# EAGLE board 6309 (EAGLE 9.6.2)
REV: B
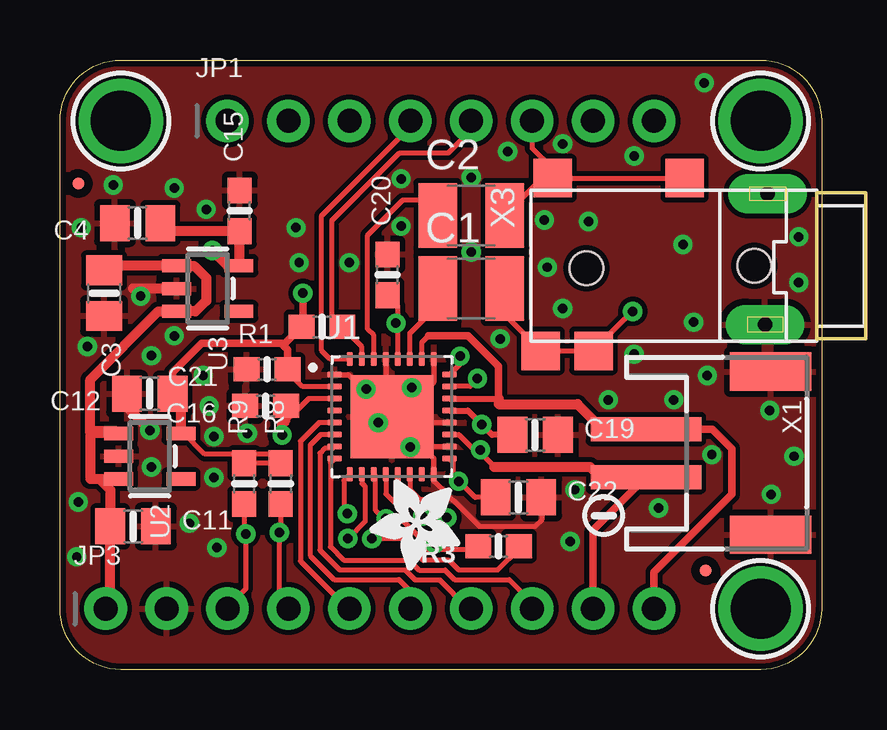
[diagram p0: board, top side]
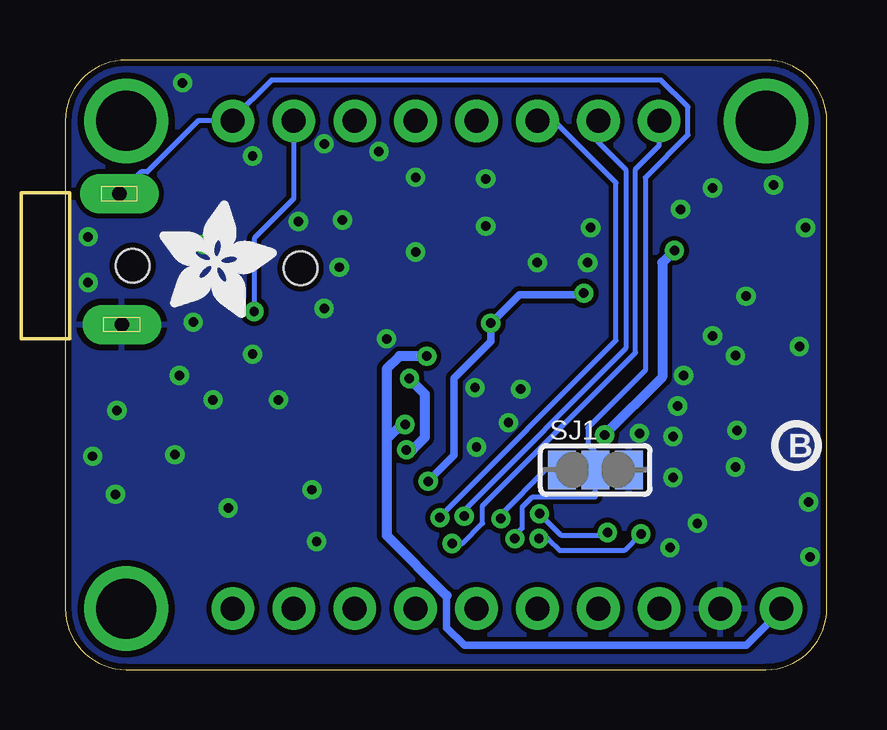
[diagram p1: board, bottom side, seen from below]

Size 31.75 x 25.4 mm. Coordinates in mm from the lower left corner, seen from the top.
Outline: 2.54,25.4 29.21,25.4 arc-90 31.75,22.86 31.75,2.54 arc-90 29.21,0 2.54,0 arc-90 0,2.54 0,22.86 arc-90 2.54,25.4
Copper layers (1*16): Top 0.035mm / dielectric 1.5mm / Bottom 0.035mm
Design rules "adafruit *": minimum track width 8mil, minimum drill 15.5mil, track to track 8mil, track to pad 8mil, pad to pad 8mil, via to via 8mil, smd to smd 8mil, copper to edge 10mil, drill to drill 8mil, minimum pad ring 10mil, minimum via ring 8mil, stop-mask expansion 2mil, vias tented up to drill 20mil, thermal gap 10mil

## Footprints (pad centres in the part's own frame; a part is rotated, then mirrored left to right if it is on the bottom)
C1210 = smd 1.6 x 2.7: 1 -1.4,0; 2 1.4,0
0805-NO = smd 1.24 x 1.5: 1 -0.95,0; 2 0.95,0
0603-NO = smd 1.075 x 1: 1 -0.85,0; 2 0.85,0
FIDUCIAL_0.5MM = smd 0.5 x 0.5: 1 0,0
1X08_ROUND_70 = drill 1 pad 1.778: 1 -8.89,0; 2 -6.35,0; 3 -3.81,0; 4 -1.27,0; 5 1.27,0; 6 3.81,0; 7 6.35,0; 8 8.89,0
1X10_ROUND70 = drill 1 pad 1.778: 1 -11.43,0; 2 -8.89,0; 3 -6.35,0; 4 -3.81,0; 5 -1.27,0; 6 1.27,0; 7 3.81,0; 8 6.35,0; 9 8.89,0; 10 11.43,0
SOLDERJUMPER_2WAY_OPEN_NOPASTE = smd 1.168 x 1.6: 1 -1.397,0; 2 0,0; 3 1.397,0
TLV320DAC3100 = smd 0.6 x 0.25: 1 -2.4,1.75; 2 -2.4,1.25; 3 -2.4,0.75; 4 -2.4,0.25; 5 -2.4,-0.25; 6 -2.4,-0.75; 7 -2.4,-1.25; 8 -2.4,-1.75; 17 2.4,-1.75; 18 2.4,-1.25; 19 2.4,-0.75; 20 2.4,-0.25; 21 2.4,0.25; 22 2.4,0.75; 23 2.4,1.25; 24 2.4,1.75 | smd 0.25 x 0.6: 9 -1.75,-2.4; 10 -1.25,-2.4; 11 -0.75,-2.4; 12 -0.25,-2.4; 13 0.25,-2.4; 14 0.75,-2.4; 15 1.25,-2.4; 16 1.75,-2.4; 25 1.75,2.4; 26 1.25,2.4; 27 0.75,2.4; 28 0.25,2.4; 29 -0.25,2.4; 30 -0.75,2.4; 31 -1.25,2.4; 32 -1.75,2.4 | smd 3.45 x 3.45: 33 0,0
SOT23-5 = smd 0.55 x 1.2: 1 -0.95,-1.3; 2 0,-1.3; 3 0.95,-1.3; 4 0.95,1.3; 5 -0.95,1.3
MOUNTINGHOLE_2.5_PLATED = drill 2.5 pad 3.2: P$1 0,0
JSTPH2 = smd 1 x 4.6: 1 -1,-2.303; 2 1,-2.303 | smd 1.6 x 3.4: NC1 -3.4,2.897; NC2 3.4,2.897
PJ-332A = drill 0.6 pad 1.651 long: 1 -4.792,-3; 2 -4.692,2.45 | smd 1.6 x 1.6: 3 -1.342,-3.65; 4 2.458,3.55; 5 4.158,-3.65; 6 4.658,3.55 | hole 1.4: -4.242,0; 2.758,0.1

## Placement (x,y rotation side)
C1  100uF/6.3V  [C1210]  17.14,15.88 0 top
C2  100uF/6.3V  [C1210]  17.14,18.92 0 top
C3  10uF  [0805-NO]  1.84,15.68 270 top
C4  10uF  [0805-NO]  3.24,18.61 180 top
C11  10uF  [0805-NO]  3.05,5.97 0 top
C12  10uF  [0805-NO]  3.75,11.49 180 top
C15  0.1uF  [0603-NO]  7.49,19.11 90 top
C16  0.1uF  [0603-NO]  8.57,10.99 180 top
C19  10uF  [0805-NO]  19.81,9.78 0 top
C20  0.1uF  [0603-NO]  13.65,16.45 90 top
C21  0.1uF  [0603-NO]  8.64,12.51 180 top
C22  10uF  [0805-NO]  19.11,7.18 0 top
E$1  [SYMBOL_MINUS]  22.67,6.41 0 top
FID1  FIDUCIAL_0.5MM  [FIDUCIAL_0.5MM]  26.92,4.13 0 top
FID2  FIDUCIAL_0.5MM  [FIDUCIAL_0.5MM]  0.76,20.26 0 top
JP1  [1X08_ROUND_70]  15.88,22.86 0 top
JP3  [1X10_ROUND70]  13.34,2.54 0 top
PLABEL0  [PLABEL0]  9.65,0.95 0 top
PLABEL1  [PLABEL1]  19.81,0.95 0 top
PLABEL2  [PLABEL2]  2.22,4.19 0 top
PLABEL3  [PLABEL3]  22.35,4.13 0 top
PLABEL4  [PLABEL4]  4.38,0.95 0 top
PLABEL5  [PLABEL5]  17.14,4.06 0 top
PLABEL6  [PLABEL6]  14.67,0.95 0 top
PLABEL7  [PLABEL7]  12.13,4.13 0 top
PLABEL8  [PLABEL8]  12,21.27 0 top
PLABEL9  [PLABEL9]  14.67,24.45 0 top
PLABEL10  [PLABEL10]  19.68,24.45 0 top
PLABEL11  [PLABEL11]  9.65,24.45 0 top
PLABEL12  [PLABEL12]  6.92,4.13 0 top
PLABEL13  [PLABEL13]  22.67,21.27 0 top
PLABEL14  [PLABEL14]  17.27,21.21 0 top
PLABEL15  [PLABEL15]  25.21,0.95 0 top
PLABEL16  [PLABEL16]  8.38,17.4 0 top
PLABEL17  [PLABEL17]  24.7,24.45 0 top
PLABEL18  [PLABEL18]  7.05,21.27 0 top
PLABEL19  [PLABEL19]  19.62,10.86 0 top
PLABEL20  [PLABEL20]  13.14,19.75 0 bottom
PLABEL21  [PLABEL21]  9.59,10.29 0 bottom
PLABEL22  [PLABEL22]  12.64,8.45 90 bottom
PLABEL23  [PLABEL23]  6.67,8.45 90 bottom
PLABEL24  [PLABEL24]  20.57,14.22 0 bottom
PLABEL25  [PLABEL25]  27.43,12 0 bottom
PLABEL26  [PLABEL26]  31.37,5.4 0 bottom
R1  10k  [0603-NO]  10.92,14.29 180 top
R3  2.2K  [0603-NO]  18.29,5.14 180 top
R8  10k  [0603-NO]  9.21,7.75 90 top
R9  10k  [0603-NO]  7.68,7.75 90 top
SJ1  [SOLDERJUMPER_2WAY_OPEN_NOPASTE]  9.65,8.32 0 bottom
U1  TLV320DAC3100  [TLV320DAC3100]  13.84,10.54 0 top
U2  AP2127K-3.3  [SOT23-5]  3.75,8.89 270 top
U3  AP2127K-1.8  [SOT23-5]  6.16,15.88 270 top
U$5  [PCBFEAT-REV-040]  1.27,9.33 0 bottom
U$6  [ADAFRUIT_5MM]  27.81,14.67 0 bottom
U$12  MOUNTINGHOLE2.5  [MOUNTINGHOLE_2.5_PLATED]  29.21,2.54 0 top
U$13  MOUNTINGHOLE2.5  [MOUNTINGHOLE_2.5_PLATED]  2.54,22.86 0 top
U$14  MOUNTINGHOLE2.5  [MOUNTINGHOLE_2.5_PLATED]  29.21,22.86 0 top
U$29  [ADAFRUIT_3.5MM]  16.7,7.94 180 top
X1  CON_JST_PH_2PIN_MTPH2  [JSTPH2]  26.73,9.02 270 top
X3  TRRS_2SWITCH_PJ332A  [PJ-332A]  24.7,16.83 180 top

## Library data of the parts
C1 C2 = rcl; SPICEPREFIX: C
C3 C4 C11 C12 C15 C16 C19-C22 E$1 FID1 FID2 JP1 JP3 R1 R3 R8 R9 SJ1 U1 U$6 U$29 = microbuilder
PLABEL0 PLABEL1-PLABEL26 = pinguin
U2 U3 = adafruit_power; JLC_ROTATION: 270
U$5 = microbuilder; REV: B
U$12-U$14 = adafruit_electromech; BOM: EXCLUDE
X1 = adafruit_electromech; LCSC: C47647
X3 = adafruit_electromech

## Nets
1.8V: C4.1 C15.1 C16.1 U1.3 U3.5
3.3V: C12.1 C20.1 C21.1 C22.1 R1.2 R8.2 R9.2 U1.2 U1.17 U1.28 U2.5
!RESET: JP1.5 R1.1 U1.31
AGND: C3.2 C4.2 C11.2 C12.2 C15.2 C16.2 C19.2 C20.2 C21.2 C22.2 JP3.2 SJ1.3 U1.1 U1.16 U1.18 U1.20 U1.25 U1.29 U1.33 U2.2 U3.2 X1.NC1 X1.NC2 X3.2
AIN1: JP1.2 U1.13
AIN2: JP1.3 U1.14
BITCLK_IN: JP3.7 U1.7
DATA_IN: JP3.5 U1.5
GPIO1: JP1.4 U1.32
HPL: C1.1 U1.27
HPR: C2.1 U1.30
MCLK: JP3.8 U1.8
MIC: JP1.8 R3.1 SJ1.2 X3.1
MICBIAS: JP1.1 R3.2 U1.12
MICDET: SJ1.1 U1.11
OUTL: C1.2 JP1.7 X3.4 X3.6
OUTR: C2.2 JP1.6 X3.3 X3.5
SCL: JP3.3 R9.1 U1.10
SDA: JP3.4 R8.1 U1.9
SPKM: JP3.9 U1.19 U1.23 X1.2
SPKP: JP3.10 U1.22 U1.26 X1.1
VIN: C3.1 C11.1 C19.1 JP3.1 U1.21 U1.24 U2.1 U2.3 U3.1 U3.3
WORDSEL_IN: JP3.6 U1.6

## Tracks (layer width: path | path; a pad name or v marks a point on that pad's centre or on a via)
1.8V  (via drill 0.39)
  Top 0.203: U1.3 10.36,11.29 9.61,10.54 9.46,10.54 9.4,10.54 | 9.46,10.99 C16.1
  Top 0.406: C4.1 4.53,18.26 C15.1 7.46,18.23 U3.5 6.99,16.82 v6.35,17.46 | v9.27,9.78 9.27,10.24 9.4,10.37 9.4,10.54 | 9.46,10.54 9.46,10.99
  Bottom 0.406: v6.35,17.46 6.86,16.95 6.86,12.19 v9.27,9.78
3.3V  (via drill 0.39)
  Top 0.203: U1.2 10.12,11.79 9.49,12.42 C21.1 | C22.1 17.3,7.18 16.39,8.09 16.39,8.65 U1.17 | U1.28 14.09,14.48 14.09,15.16 C20.1 | R9.2 R8.2 8.83,8.98 6.04,8.98 5.17,9.84 U2.5
  Top 0.305: C21.1 9.49,13.34 9.3,13.52 | 9.3,13.52 R1.2 10.13,14.34 v10.13,15.68 | C12.1 4.7,12.38 5.91,13.59 9.23,13.59 9.3,13.52 | v16.62,7.84 16.62,7.86 16.39,8.09 | v14.01,14.44 14.05,14.44 14.09,14.48
  Top 0.406: U2.5 5.05,11.14 C12.1
  Bottom 0.305: v16.62,7.84 15.54,8.92 15.54,12.15 14.01,13.68 v14.01,14.44 12.82,15.62 10.19,15.62 v10.13,15.68
!RESET
  Top 0.203: U1.31 12.59,13.44 11.77,14.26 R1.1 11.33,14.73 11.33,18.69 14.16,21.53 16.19,21.53 17.53,22.86 JP1.5
AGND  (via drill 0.39)
  Top 0.203: U1.29 13.59,10.99 | 13.59,10.99 13.59,10.92 | 13.59,10.92 13.59,10.79 U1.33 | U1.1 12.03,12.29 13.4,10.92 13.59,10.92 | U1.25 15.59,11.97 14.61,10.99 13.59,10.99 | U1.20 14.09,10.29 | 14.09,10.29 U1.33 | U1.18 15.09,9.29 | 15.09,9.29 14.09,10.29 | 15.09,9.29 15.59,8.79 U1.16 15.59,7.84 16.4,7.04 16.42,7.04 17.49,5.97 19.81,5.97 20.11,6.27 20.11,7.13 | U1.33 13.46,10.54 13.24,10.32 v13.27,10.29
  Top 0.406: C22.2 20.11,7.13 | v3.75,9.97 3.45,10.26 3.45,10.28 2.8,10.94 C12.2 | U3.2 3.05,15.88 | 2.03,14.73 C3.2
  other vias: 14.22,18.48 4.76,20.07 9.84,18.41 9.97,16.95 12.76,11.68 14.67,11.75 14.61,9.27 21.46,7.49 25.59,11.24 20.95,15.05 20.19,18.73 17.14,20.51 3.81,13.08 4.76,13.91 3.81,8.45 1.14,13.46 0.89,18.41 2.22,20.19 0.76,6.99 0.7,4.7 6.54,5.08 7.81,9.84 22.86,11.24 27.18,8.95 24.96,6.73 3.37,15.56 12.06,16.95 14.22,20.45 26.99,12.26 26.42,14.48 25.97,17.72 20.32,16.76 22.03,18.67 23.94,21.4 20.95,21.91 18.67,21.59 30.8,16.13 30.8,18.03 29.59,10.79 29.65,7.3 30.61,8.89 21.27,5.33 18.35,13.78 17.14,17.4 26.86,24.45 5.97,12.26 6.22,10.99 6.41,9.72 6.41,8 5.4,6.1 6.1,19.18 23.94,13.14
  pour Top: 0,25.4 0,0 31.75,0 31.75,25.4
  pour Bottom: 0,25.4 0,0 31.75,0 31.75,25.4
AIN1  (via drill 0.39)
  Top 0.203: U1.13 14.09,7.41 v15.11,6.39
  Bottom 0.203: v15.11,6.39 15.11,6.65 8.38,13.38 8.38,20.83 9.53,21.97 JP1.2
AIN2  (via drill 0.39)
  Top 0.203: U1.14 14.59,7.49 14.99,7.1 15.4,7.1 16.13,6.38 v16.13,6.33
  Bottom 0.203: v16.13,6.33 16.17,6.33 8.79,13.72 8.79,20.28 11.37,22.86 JP1.3
BITCLK_IN
  Top 0.203: U1.7 11.37,9.22 11.04,9.22 10.84,9.02 10.84,4.97 11.66,4.15 14.39,4.15 14.81,3.73 15.82,3.73 17.02,2.54 JP3.7
DATA_IN
  Top 0.203: U1.5 10.8,10.29 10.03,9.52 10.03,4.52 12,2.54 JP3.5
GPIO1
  Top 0.203: U1.32 11.27,12.94 10.91,13.29 10.91,18.91 14.86,22.86 JP1.4
HPL
  Top 0.203: U1.27 14.59,14.02 15.74,15.18 C1.1
HPR
  Top 0.203: U1.30 13.09,13.93 12.83,14.19 12.83,18.1 14.29,19.56 15.11,19.56 C2.1
MCLK
  Top 0.203: U1.8 11.27,8.62 11.27,5.11 11.83,4.56 14.56,4.56 14.98,4.14 16.06,4.14 16.45,3.75 18.73,3.75 19.68,2.79 JP3.8
MIC  (via drill 0.39)
  Top 0.203: v13,5.46 14.24,5.46 15.14,4.55 16.22,4.55 16.62,4.15 18.25,4.15 19.14,5.04 R3.1
  Bottom 0.203: X3.1 28.58,20.74 28.33,20.74 26.21,22.86 JP1.8 24.77,22.95 23.15,24.56 6.91,24.56 5.79,23.44 5.79,22.28 7.57,20.5 7.57,12.47 9.97,10.07 9.97,9.37 9.65,9.05 SJ1.2 9.65,7.2 12.27,7.2 12.71,6.76 12.71,5.88 13,5.58 v13,5.46
MICBIAS  (via drill 0.39)
  Top 0.203: U1.12 13.59,7.32 14.36,6.55 14.36,6.14 15.44,5.05 | R3.2 17.29,4.99 15.37,4.99 15.44,5.05 | 15.44,5.05 15.62,5.24 v15.62,5.25
  Bottom 0.203: v15.62,5.25 15.2,5.25 14.35,6.1 14.35,6.84 7.98,13.21 7.98,20.85 6.99,21.84 JP1.1
MICDET  (via drill 0.39)
  Top 0.203: v13.59,6.29 13.5,6.29 13.16,6.63 13.16,8.07 U1.11
  Bottom 0.203: SJ1.1 11.73,8.32 13.59,6.46 v13.59,6.29
N$1
  Bottom 0.203: 10.1,8.32 10.6,8.32
OUTL  (via drill 0.39)
  Top 0.203: C1.2 18.55,14.78 X3.6 22.23,13.28 | 22.23,13.28 X3.4 | v23.88,14.92 v23.87,14.92 22.23,13.28
  Bottom 0.203: JP1.7 22.23,19.62 23.88,17.97 v23.88,14.92
OUTR
  Top 0.203: C2.2 20.1,20.48 X3.5 | X3.5 X3.3 | JP1.6 19.68,21.72 20.54,20.86 X3.5
SCL  (via drill 0.39)
  Top 0.203: R9.1 7.68,5.71 v7.75,5.65 7.75,3.37 6.99,2.6 JP3.3 | U1.10 12.59,7.76 12.72,7.63 12.72,6.18 v12,5.46
  Bottom 0.203: v7.75,5.65 8.45,4.95 11.11,4.95 11.62,5.46 v12,5.46
SDA  (via drill 0.39)
  Top 0.203: U1.9 11.84,7.89 11.84,6.63 v11.98,6.5 | R8.1 9.21,5.78 v9.14,5.71 9.14,2.92 JP3.4
  Bottom 0.203: v9.14,5.71 9.25,5.61 11.09,5.61 v11.98,6.5
SPKM  (via drill 0.39)
  Top 0.203: U1.19 16.62,9.79 17.26,9.16 v17.53,9.16 17.53,9.03 18.11,8.45 | U1.23 17.09,11.8 17.4,12.1 v17.4,12.13
  Top 0.305: JP3.9 22.23,5.81 X1.2
  Top 0.406: 18.11,8.45 22.1,8.45 22.53,8.02 X1.2
  Bottom 0.406: v17.53,9.16 17.27,9.16 16.77,9.66 16.77,11.49 v17.4,12.13
SPKP
  Top 0.203: U1.26 15.09,13.63 15.37,13.91
  Top 0.254: U1.22 18.29,11.29
  Top 0.305: 15.37,13.91 17.02,13.91 18.29,12.64 18.29,11.29 | JP3.10 24.77,4.06 28,7.3 28,9.21 27.19,10.02 X1.1
  Top 0.406: 18.29,11.29 18.29,11.06 21.58,11.06 22.62,10.02 X1.1
VIN  (via drill 0.39)
  Top 0.203: U1.24 16.68,12.73 v16.68,13.06
  Top 0.254: C19.1 18.02,9.78 v17.58,10.21 17,10.79 U1.21
  Top 0.406: U2.3 1.65,7.94 | 1.65,7.94 1.27,7.94 1.27,9.93 2.36,9.93 U2.1 1.26,9.84 1.26,12.09 4.1,14.93 U3.3 5.65,14.93 6.1,15.37 6.1,16.32 5.59,16.82 U3.1 2.03,16.82 C3.1 | 1.65,7.94 2.1,7.49 C11.1 2.1,2.73 JP3.1
  Bottom 0.203: 17.66,10.29 v17.58,10.21
  Bottom 0.305: JP3.1 1.91,2.48 3.37,1.02 15.11,1.02 15.85,1.75 15.85,3.09
  Bottom 0.406: v16.68,13.06 17.82,13.06 18.35,12.53 18.35,9.6 | 17.66,10.29 18.35,9.6 | 18.35,9.6 18.35,5.59 15.85,3.09
WORDSEL_IN
  Top 0.203: U1.6 10.87,9.79 10.43,9.35 10.43,4.75 11.43,3.75 14.13,3.75 14.61,3.27 JP3.6

## Text on the board
Pinguin_tBackup: HPR | MIC | AIN1 | IO | BIAS | AIN2 | RST | HPL | TLV320 / DAC / 3100 | 4-8 ohm | VIN | SCL | DIN | BCK | SPK- | GND | SDA | WSEL | MCLK | SPK+
Pinguin_bBackup: TLV320DAC3100 | Mono Class D Amp / 2.5W 4Ω or 1.6W 8Ω | Stereo Headphone: 16Ω min | Mic | GND | Det | I2C Addr: 0x18 / Vin: 3~5V (5 for SPKR) / Vlogic: 3.3V only!